# Altium PCB PCB1.PcbDoc
Units mm, origin at the board's own origin, x right, y up, seen from the top; angles counter-clockwise.
Board outline 32 x 41 mm, 2 copper layers (Top Layer, Bottom Layer); 3 components, 20 nets, 68 pads, 46 vias.
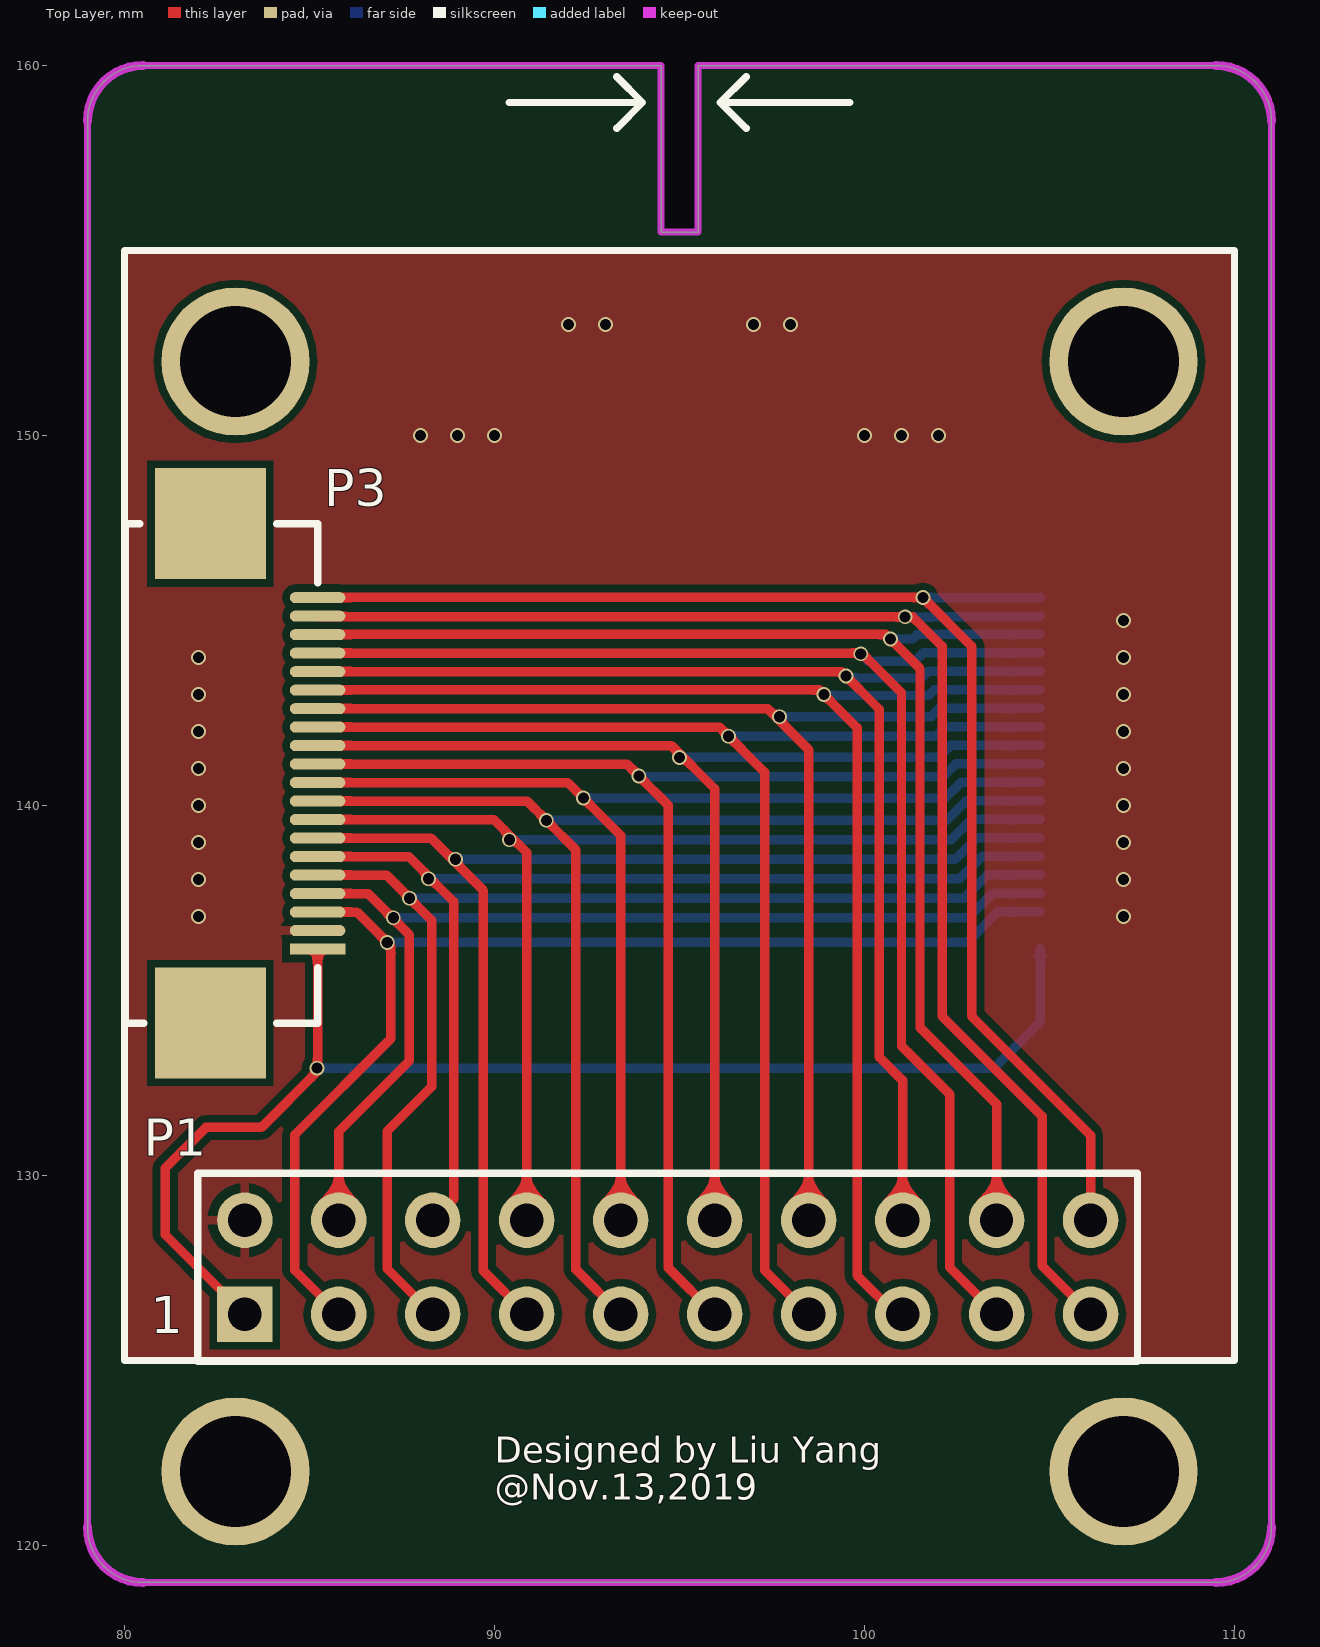
[diagram p0: Top Layer view]
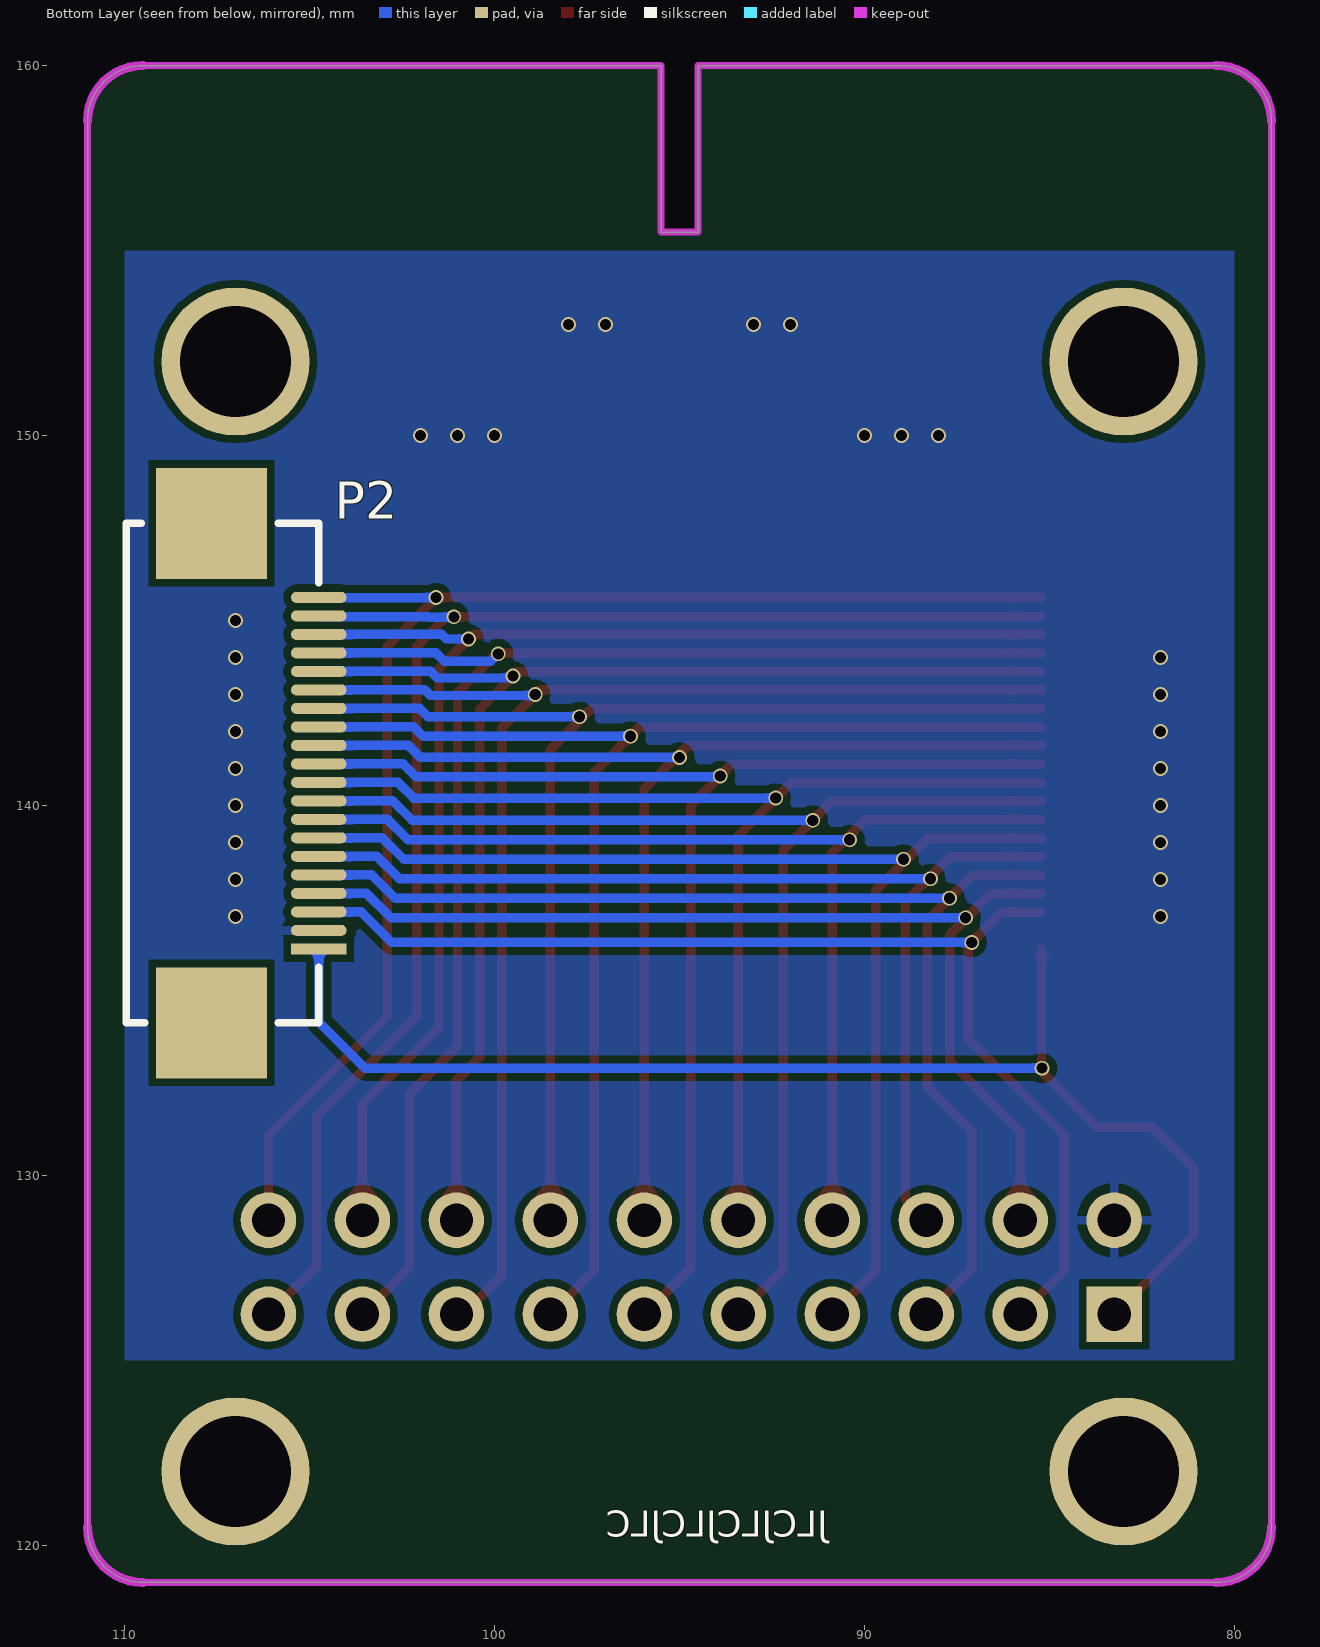
[diagram p1: Bottom Layer view, seen from below]

## Layer stack, top to bottom
Top Solder: solder mask 0.0102, Solder Resist, Dk 3.5
Top Layer: signal copper 0.0356
Dielectric 1: dielectric 0.32, FR-4, Dk 4.8
Bottom Layer: signal copper 0.0356
Bottom Solder: solder mask 0.0102, Solder Resist, Dk 3.5

## Board outline
79,120.5 79,158.5 cw(c80.5,158.5) 80.5,160 94.5,160 94.5,155.5 95.5,155.5 95.5,160 109.5,160 cw(c109.5,158.5) 111,158.5 111,120.5 cw(c109.5,120.5) 109.5,119 80.5,119 cw(c80.5,120.5)

## Design rules (kind name [scope] priority, off if disabled: settings)
Clearance [All] p1: gap=0.2
PolygonConnect [All] p1: connectstyle=Relief reliefconductorwidth=0.254 reliefentries=4 polygonreliefangle="90 Angle" airgapwidth=0.254
RoutingVias [All] p1: holewidth=0.6 width=1 viastyle="Through Hole" minholewidth=0.711 minwidth=1.27 maxholewidth=0.711 maxwidth=1.27
SolderMaskExpansion [All] p1: expansion=0.102
Width [All] p1: maxlimit=0.508 minlimit=0.2 preferedwidth=0.254
30 further rules are at their usual default settings.

## Components (designator, comment, footprint, x,y, rotation, side; value= is the part's Value field where it differs from the comment)
P1 "Header 10X2" HDR2X10 83.25,126.25 r0 top
P2 "Header 22" FPC20Pin 104.75,136.125 r0 bottom
P3 "Header 22" FPC20Pin 85.217,136.119 r180 top

## Footprints (in the part's own frame and the unit in brackets; to place one, negate y for a bottom-side part, rotate by r counter-clockwise, add the part's x,y. Pads: shape width x height; smd on the part's side, far side on the other; paste and mask are expansions set on the pad)
FPC20Pin [mm]
  rect 1.5x0.3 smd: 1(0,0)
  oval 1.5x0.3 smd: 2(0,-0.5) 3(0,-1) 4(0,-1.5) 5(0,-2) 6(0,-2.5) 7(0,-3) 8(0,-3.5) 9(0,-4) 10(0,-4.5) 11(0,-5) 12(0,-5.5) 13(0,-6) 14(0,-6.5) 15(0,-7) 16(0,-7.5) 17(0,-8) 18(0,-8.5) 19(0,-9) 20(0,-9.5)
  rect 3x3 smd: 21(2.9,2) 22(2.9,-11.5)
  silkscreen extent 0,-11.5 5.2,2
HDR2X10 [mm] "Connector; Header; 10x2 Position"
  rect 1.5x1.5 hole 0.9: 1(0,0)
  round 1.5 hole 0.9: 2(0,2.54) 3(2.54,0) 4(2.54,2.54) 5(5.08,0) 6(5.08,2.54) 7(7.62,0) 8(7.62,2.54) 9(10.16,0) 10(10.16,2.54) 11(12.7,0) 12(12.7,2.54) 13(15.24,0) 14(15.24,2.54) 15(17.78,0) 16(17.78,2.54) 17(20.32,0) 18(20.32,2.54) 19(22.86,0) 20(22.86,2.54)
  silkscreen extent -1.27,-1.27 24.13,3.81

## Part data
P1: "Header, 10-Pin, Dual row"
P2 P3: "Header, 22-Pin"

## Free pads (board coordinates)
  round 4 hole 3: 0(83,152) 1(107,152) 2(107,122) 3(83,122)

## Via types
v1: diameter 0.4, hole 0.3, Top Layer to Bottom Layer, 46 vias

## Nets (pads, with @x,y where several pads share a name; then routed paths per layer and width w, separated by ;. In a path a pad name is that pad's centre, name@x,y a point inside that pad or via, vN(x,y) a via of type N, cw(c..) or ccw(c..) an arc to the next point about the centre after c; other vN are vias at no path point)
D1: P1.3 P2.3 P3.3 | length 31.9
  Top Layer w0.254: P3.3 86.281,137.119 87.2,136.2 87.2,133.7 84.6,131.1 84.6,127.44 P1.3
  Bottom Layer w0.254: v1(87.1,136.3) 102.778,136.3 103.603,137.125 P2.3
D2: P1.4 P2.4 P3.4 | length 29.2
  Top Layer w0.254: P3.4 86.581,137.619 87.7,136.5 87.7,133.1 85.79,131.19 P1.4
  Bottom Layer w0.254: v1(87.265,136.965) 102.801,136.965 103.461,137.625 P2.4
D3: P1.5 P2.5 P3.5 | length 32.6
  Top Layer w0.254: P3.5 87.081,138.119 88.3,136.9 88.3,132.4 87.1,131.2 87.1,127.48 P1.5
  Bottom Layer w0.254: v1(87.7,137.492) 102.686,137.492 103.319,138.125 P2.5
D4: P1.6 P2.6 P3.6 | length 29.8
  Top Layer w0.254: P3.6 87.681,138.619 88.9,137.4 88.9,129.36 P1.6
  Bottom Layer w0.254: v1(88.219,138.019) 102.571,138.019 103.177,138.625 P2.6
D5: P1.7 P2.7 P3.7 | length 33
  Top Layer w0.254: P3.7 88.281,139.119 89.7,137.7 89.7,127.42 P1.7
  Bottom Layer w0.254: v1(88.946,138.546) 102.456,138.546 103.035,139.125 P2.7
D6: P1.8 P2.8 P3.8 | length 30.5
  Top Layer w0.254: P3.8 89.981,139.619 90.87,138.73 P1.8
  Bottom Layer w0.254: v1(90.4,139.073) 102.341,139.073 102.893,139.625 P2.8
D7: P1.9 P2.9 P3.9 | length 34.1
  Top Layer w0.254: P3.9 90.881,140.119 v1(91.4,139.6) 92.2,138.8 92.2,127.46 P1.9
  Bottom Layer w0.254: v1(91.4,139.6) 102.226,139.6 102.751,140.125 P2.9
D8: P1.10 P2.10 P3.10 | length 31.7
  Top Layer w0.254: P3.10 91.981,140.619 92.2,140.4 v1(92.4,140.2) 93.41,139.19 P1.10
  Bottom Layer w0.254: v1(92.4,140.2) 102.184,140.2 102.609,140.625 P2.10
D9: P1.11 P2.11 P3.11 | length 35.2
  Top Layer w0.254: P3.11 93.581,141.119 v1(93.9,140.8) 94.7,140 94.7,127.5 P1.11
  Bottom Layer w0.254: v1(93.9,140.8) 93.927,140.773 102.115,140.773 102.467,141.125 P2.11
D10: P1.12 P2.12 P3.12 | length 32.8
  Top Layer w0.254: P3.12 94.781,141.619 95.95,140.45 P1.12
  Bottom Layer w0.254: v1(95,141.3) 102,141.3 102.325,141.625 P2.12
D11: P1.13 P2.13 P3.13 | length 36.3
  Top Layer w0.254: P3.13 96.081,142.119 97.3,140.9 97.3,127.44 P1.13
  Bottom Layer w0.254: v1(96.327,141.873) 101.931,141.873 102.183,142.125 P2.13
D12: P1.14 P2.14 P3.14 | length 33.6
  Top Layer w0.254: P3.14 97.381,142.619 98.49,141.51 P1.14
  Bottom Layer w0.254: v1(97.7,142.4) 101.8,142.4 102.025,142.625 P2.14
D13: P1.15 P2.15 P3.15 | length 37.4
  Top Layer w0.254: P3.15 85.225,143.127 98.773,143.127 99.8,142.1 99.8,127.3 100.85,126.25 P1.15
  Bottom Layer w0.254: v1(98.9,143) 98.927,142.973 101.731,142.973 101.883,143.125 P2.15
D14: P1.16 P2.16 P3.16 | length 35
  Top Layer w0.254: P3.16 99.381,143.619 100.4,142.6 100.4,133.2 101.03,132.57 P1.16
  Bottom Layer w0.254: v1(99.5,143.5) 99.554,143.446 101.546,143.446 101.725,143.625 P2.16
D15: P1.17 P2.17 P3.17 | length 39.2
  Top Layer w0.254: P3.17 99.927,144.119 v1@99.909,144.1 ; v1(99.9,144.1) v1@99.909,144.1 ; P1.17 102.3,127.52 102.3,132.2 101,133.5 101,143.046 99.946,144.1 v1@99.909,144.1
  Bottom Layer w0.254: v1(99.9,144.1) 100.1,143.9 101.358,143.9 101.583,144.125 P2.17
D16: P1.18 P2.18 P3.18 | length 36.5
  Top Layer w0.254: P3.18 85.225,144.627 100.573,144.627 v1(100.7,144.5) 101.5,143.7 101.5,134 103.57,131.93 P1.18
  Bottom Layer w0.254: v1(100.7,144.5) 101.3,144.5 101.425,144.625 P2.18
D17: P1.19 P2.19 P3.19 | length 40.6
  Top Layer w0.254: P3.19 85.236,145.1 v1(101.1,145.1) 101.3,145.1 102.1,144.3 102.1,134.3 104.8,131.6 104.8,127.56 P1.19
  Bottom Layer w0.254: v1(101.1,145.1) 101.108,145.092 101.8,145.092 101.808,145.1 103.95,145.1 103.95,145.102 104.727,145.102 P2.19
D18: P1.20 P2.20 P3.20 | length 38.2
  Top Layer w0.254: P3.20 85.225,145.627 101.573,145.627 v1(101.581,145.619) 102.9,144.3 102.9,134.3 106.11,131.09 P1.20
  Bottom Layer w0.254: v1(101.581,145.619) 104.744,145.619 P2.20
GND: P1.2 P2.2 P3.2
  other v1: 82,137 107,137 82,138 107,138 82,139 107,139 82,140 107,140 82,141 107,141 82,142 107,142 82,143 107,143 82,144 107,144 107,145 88,150 89,150 90,150 100,150 101,150 102,150 92,153 93,153 97,153 98,153
VCC: P1.1 P2.1 P3.1 | length 35.4
  Top Layer w0.254: P1.1 81.1,128.4 81.1,130.2 82.2,131.3 83.7,131.3 85.217,132.817 P3.1
  Bottom Layer w0.254: v1(85.2,132.9) 103.5,132.9 104.75,134.15 P2.1
pads on no net: P2.21 P2.22 P3.21 P3.22

## Polygon pours and split planes (outlines as drawn)
GND on Bottom Layer "Bottom Layer-No Net" (solid, remove dead copper, pour order 0): 80,155 80,125 110,125 110,155 109.9,155
GND on Top Layer "Bottom Layer-No Net" (solid, remove dead copper, pour order 2): 80,155 110,155 110,125 80,125

## Keep-outs
Keep-Out Layer:
  lines w0.2: 79,120.5 79,124 79,156 79,158.5 ; 80.5,119 109.5,119 ; 80.5,160 87,160 94.5,160 94.5,155.5 95.5,155.5 95.5,160 103,160 109.5,160 ; 111,120.5 111,124 111,156 111,158.5
  lines w0.254: 79,120.5 ccw(c80.5,120.5) 80.5,119 ; 79,158.5 cw(c80.5,158.5) 80.5,160 ; 109.5,119 ccw(c109.5,120.5) 111,120.5 ; 109.5,160 cw(c109.5,158.5) 111,158.5

## Silkscreen, mask and mechanical layers (free items; w line width, h text height)
Top Overlay:
  lines w0.2: 90.4,159 94,159 ; 93.3,158.3 94,159 ; 93.3,159.7 94,159 ; 96.8,158.3 96.1,159 ; 96.8,159.7 96.1,159 ; 99.6,159 96.1,159 ; 94,159 94,159 ; 96.1,159 96.1,159 ; 96.1,159 96.1,159 ; 80,125 80,155 110,155 110,125 80,125
  text "Designed by Liu Yang" at 90,122 h1.2
  text "@Nov.13,2019" at 90,121 h1.2
Bottom Overlay:
  text "JLCJLCJLCJLC" at 91,120 h1.2

## Text inside footprints (layer, text, board x,y; h text height)
P1: Top Overlay "1" at 80.71,125.742 h1